# Altium PCB Cockpit.PcbDoc
Units mm, origin at the board's own origin, x right, y up, seen from the top; angles counter-clockwise.
Board outline 35 x 35 mm, 2 copper layers (Top Layer, Bottom Layer), stack 1.57 mm thick; 26 components, 19 nets, 72 pads, 0 vias.
Unrouted connection lines stored in the file: 46.
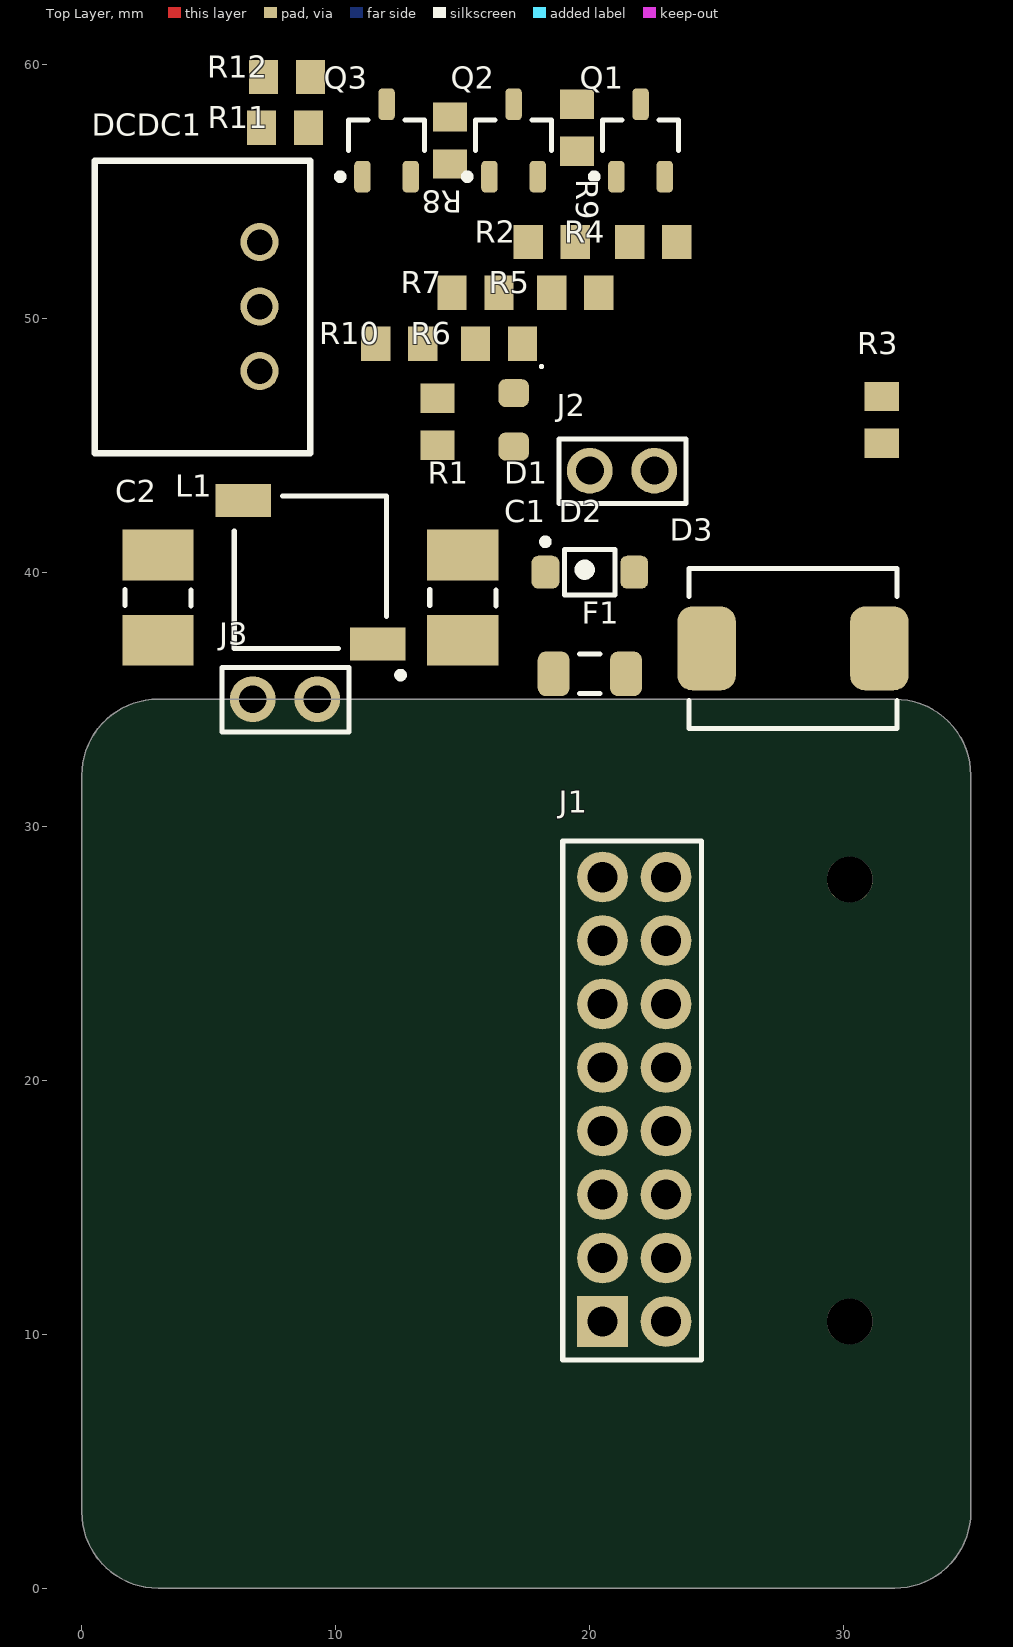
[diagram p0: Top Layer view]
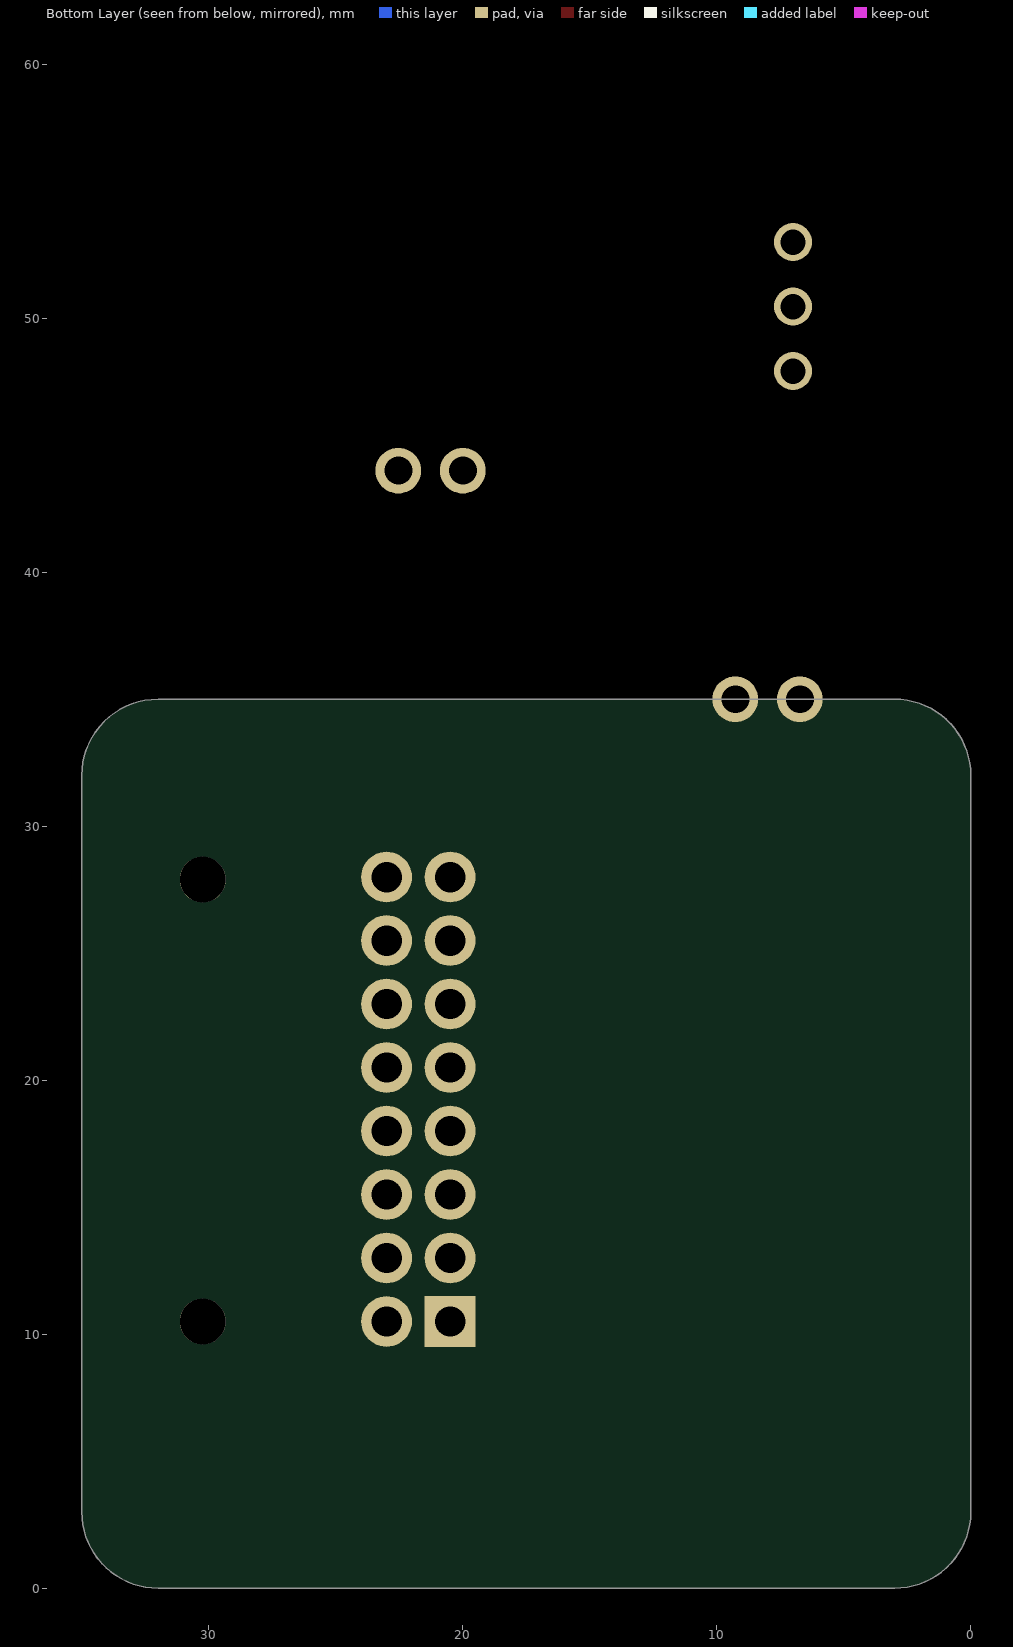
[diagram p1: Bottom Layer view, seen from below]

## Layer stack, top to bottom
Top Solder: solder mask 0.01, Solder Resist, Dk 3.5
Top Layer: signal copper 0.035
Dielectric 1: dielectric 1.5, FR-4, Dk 4.8
Bottom Layer: signal copper 0.035
Bottom Solder: solder mask 0.01, Solder Resist, Dk 3.5

## Board outline
3,0 cw(c3,3) 0,3 0,32 cw(c3,32) 3,35 32,35 cw(c32,32) 35,32 35,3 cw(c32,3) 32,0

## Design rules (kind name [scope] priority, off if disabled: settings)
Clearance [All] p1: gap=0.5 ignorepadtopadclearanceinfootprint=FALSE except(0.1: SMDPad-Hole THPad-THPad THPad-Hole Via-Hole; 0.2: Fill-Hole Poly-Hole Region-Hole)
HoleSize [All] p1: absolutevalues=TRUE maxlimit=5 minlimit=0.2 maxpercent=80.000 minpercent=20.000
HoleToHoleClearance [All] p1 off: gap=0 allowstackedmicrovias=TRUE
PolygonConnect [All] p1: connectstyle=Relief reliefconductorwidth=0.5 reliefentries=4 polygonreliefangle="90 Angle" airgapwidth=0.5
RoutingVias [All] p1: holewidth=0.3 width=0.7 viastyle="Through Hole" minholewidth=0.2 minwidth=0.5 maxholewidth=3 maxwidth=7
SolderMaskExpansion [All] p1: expansion=0.102 istentingtop=FALSE
Width [All] p1: maxlimit=5 minlimit=0.2 preferedwidth=0.5
28 further rules are at their usual default settings.

## Components (designator, comment, footprint, x,y, rotation, side; value= is the part's Value field where it differs from the comment)
C1 "GRJ32ER71H106KE11L" C10u-50V-1210FNPMLCC-X7R 15,39 r270 top
C2 "GRJ32ER71H106KE11L" C10u-50V-1210FNPMLCC-X7R 3,39 r90 top
D1 "150080VS75000" LED_0805_WE 17,46 r270 top
D2 "MBR0530" DSC-SOD123 20,40 r0 top
D3 "824551301" DTVS-DO-214AB 28,37 r180 top
DCDC1 "173951236" DCDC_Magi3c 7,50.46 r270 top
F1 "0437001.WRA" Fuse_1206 20,36 r180 top
J1 "1053141116" J_NanoFit_2x8 25.369,19.25 r90 top
J2 "61300211121" J_Pinheader_1x2 21.27,44 r180 top
J3 "61300211121" J_Pinheader_1x2 8,35 r180 top
L1 "CDC5D23BNP-470KC" L_47u-490mA_CF 9,40 r180 top
Q1 "CPH3455-TL-H" TRT-NCH-3/35-CPH 22,57 r90 top
Q2 "CPH3455-TL-H" TRT-NCH-3/35-CPH 17,57 r90 top
Q3 "CPH3455-TL-H" TRT-NCH-3/35-CPH 12,57 r90 top
R1 "CR0805-JW-102ELF" R0805FTK 14,45.925 r90 top
R2 "CR0805-JW-103ELF" R0805FTK 18.5,53 r0 top
R3 "CR0805-FX-4700GLF" R0805FTK 31.5,46 r270 top
R4 "CR0805-JW-102ELF" R0805FTK 22.5,53 r180 top
R5 "CR0805-JW-102ELF" R0805FTK 19.425,51 r180 top
R6 "CR0805-JW-102ELF" R0805FTK 16.425,49 r180 top
R7 "CR0805-JW-103ELF" R0805FTK 15.5,51 r0 top
R8 "CR0805-FX-1000ELF" R0805FTK 14.5,57 r90 top
R9 "CR0805-FX-4700GLF" R0805FTK 19.5,57.5 r270 top
R10 "CR0805-JW-103ELF" R0805FTK 12.5,49 r0 top
R11 "CR0805-FX-1000ELF" R0805FTK 8,57.5 r0 top
R12 "CR0805-FX-4700GLF" R0805FTK 8.075,59.5 r180 top

## Footprints (in the part's own frame and the unit in brackets; to place one, negate y for a bottom-side part, rotate by r counter-clockwise, add the part's x,y. Pads: shape width x height; smd on the part's side, far side on the other; paste and mask are expansions set on the pad)
C10u-50V-1210FNPMLCC-X7R [mm]
  rect 2x2.8 smd: 1(-1.675,0) 2(1.675,0)
  silkscreen extent -0.33,-1.3 0.33,1.3, body extent -1.6,-1.25 1.6,1.25, height 2.78
DCDC_Magi3c [mm]
  round 1.5 hole 1: 1(2.54,0) 2(0,0) 3(-2.54,0)
  silkscreen extent -5.75,-6.5 5.77,2, body extent -5.8,-6.5 5.8,2, height 10.2
DSC-SOD123 [mm] "SOIC, 2-Leads, Body 1,60x2,69mm, Pitch 1,27mm, IPC Low Density"
  rrect50% 1.1x1.3 smd: A(1.75,0) K(-1.75,0)
  silkscreen extent -1.87,-0.9 1,1.32, body extent -1.86,-0.8 1.86,0.8, height 1.36
DTVS-DO-214AB [mm] "Molded Diode, 2-Leads, Body 7,94x5,90mm"
  rrect50% 2.3x3.3 smd: 1(-3.4,0) 2(3.4,0)
  silkscreen extent -4.1,-3.15 4.1,3.15, body extent -4.42,-2.95 4.42,2.95, height 2.9
Fuse_1206 [mm] "Chip Resistor, 2-Leads, Body 3,20x1,58mm, IPC Medium Density"
  rrect50% 1.25x1.75 smd: 1(-1.425,0) 2(1.425,0)
  silkscreen extent -0.4,-0.77 0.4,0.77, body extent -1.6,-0.79 1.6,0.79, height 0.86
J_NanoFit_2x8 [mm]
  round 2 hole 1.2: 1(8.75,4.87) 2(6.25,4.87) 3(3.75,4.87) 4(1.25,4.87) 5(-1.25,4.87) 6(-3.75,4.87) 7(-6.25,4.87) 9(8.75,2.369) 10(6.25,2.369) 11(3.75,2.369) 12(1.25,2.369) 13(-1.25,2.369) 14(-3.75,2.369) 15(-6.25,2.369) 16(-8.75,2.369)
  rect 2x2 hole 1.2: 8(-8.75,4.87)
  round 1.8 hole 1.8: ""(-8.75,-4.87) ""(8.649,-4.87)
  silkscreen extent -10.27,0.97 10.17,6.43, body extent -10.47,-9.48 10.47,5.18, height 8.85
J_Pinheader_1x2 [mm]
  round 1.8 hole 1.1: 1(-1.27,0) 2(1.27,0)
  silkscreen extent -2.52,-1.25 2.48,1.29, body extent -2.54,-1.27 2.54,1.27, height 9.5
L_47u-490mA_CF [mm] "Precision Wire Wound Inductor, 2-Leads, Body 5,80x5,80mm, IPC Medium Density"
  rect 2.2x1.3 smd: 1(-2.65,2.825) 2(2.643,-2.832)
  silkscreen extent -3.68,-3 3,4.17, body extent -3,-3 3,3, height 2.5
LED_0805_WE [mm] "SODFL, 2-Leads, Body 1,60x3,20mm, IPC Medium Density"
  rrect50% 1.1x1.2 smd: A(1.05,0) K(-1.05,0)
  silkscreen extent -2.15,1.05 -2.05,1.15, body extent -1,-0.62 1,0.63, height 0.7
R0805FTK [mm] "Chip Resistor, 2-Leads, Body 2,00x1,25mm, IPC Medium Density"
  rect 1.15x1.35 smd: 1(-0.925,0) 2(0.925,0)
  body extent -1,-0.63 1,0.63, height 0.65
TRT-NCH-3/35-CPH [mm] "SOT23, 3-Leads, Body 2,90x2,80mm, Pitch 0,95mm, IPC Low Density"
  rrect50% 1.25x0.65 smd: D(1.425,0) G(-1.425,0.95) S(-1.425,-0.95)
  silkscreen extent -1.55,-1.5 0.8,1.95, body extent -1.4,-1.45 1.4,1.45, height 1.06

## Part data
C1 C2: library part C10u-50V-1210FNPMLCC-X7R, "Multilayer Ceramic Capacitors MLCC - SMD/SMT 1210 10uF 50volts X7R +/-10% Soft Term", Capacitance=10uF, Case Code (Imperial)=1210, Case Code (Metric)=3225, Manufacturer=Murata, Max Operating Temperature=125°C, Min Operating Temperature=-55°C, Tolerance=10%, Voltage Rating=50V, .Creator=DR, Case/Package=1210, Category="Ceramic Capacitors", ComponentLink1Description=Datasheet, ComponentLink1URL=https://eu.mouser.com/datasheet/2/281/GRJ32ER71H106KE11_01-1977929.pdf, Features="Soft Termination", Length=0.126inch, Manufacturer part number=GRJ32ER71H106KE11L, Mount="Surface Mount", Packaging="Tape and Reel", Pricing 1="1000=0,33327, 2000=0,32389, 4000=0,31450, 6000=0,30511, 8000=0,29572 (USD)", RoHS=Yes, RoHS Compliant=Yes, Stock 1=19000, Supplier 1=Avnet, Supplier Part Number 1=GRJ32ER71H106KE11L, Thickness=0.11inch, Width=0.098inch
D1: library part LEDVS-0805-40, "Led, Green, 570 Nm, 2 V, 30 Ma, 40 Mcd Rohs Compliant: Yes", Case Code (Imperial)=0805, Case Code (Metric)=2012, Color=Green, Forward Current=30mA, Forward Voltage=2V, Manufacturer 1="Wurth Electronics", Max Operating Temperature=85°C, Min Operating Temperature=-40°C, Package Quantity=4000, Supplier Part Number 1=8154237, Test Current=20mA, .Creator=DR, Case/Package=0805, Category=LEDs, ComponentLink1Description=Datasheet, ComponentLink1URL=https://www.we-online.com/catalog/datasheet/150080VS75000.pdf, ComponentLink2Description="Where buy it", ComponentLink2URL=https://katalog.we-online.de/en/led/WL-SMCW/150080VS75000, ComponentLink3Description=https://datasheet.ciiva.com/22656/150080vs75000-22656966.pdf?src-supplier=Element14, ComponentLink3URL=https://datasheet.ciiva.com/22656/150080vs75000-22656966.pdf?src-supplier=Element14, ComponentLink4Description=https://datasheet.ciiva.com/29279/759437-da-01-en-chipled-0805-w-kl-h-gruen-150080vs7500-29279047.pdf?src-supplier=Conrad, ComponentLink4URL=https://datasheet.ciiva.com/29279/759437-da-01-en-chipled-0805-w-kl-h-gruen-150080vs7500-29279047.pdf?src-supplier=Conrad, ComponentLink5Description=https://datasheet.ciiva.com/29563/150080vs75000-29563018.pdf?src-supplier=Digi-Key, ComponentLink5URL=https://datasheet.ciiva.com/29563/150080vs75000-29563018.pdf?src-supplier=Digi-Key, Dominant Wavelength=570nm, Height=0.7mm, Length=2mm, Lens Style=Clear,Rectangular, Luminous Intensity=40mcd, Manufacturer Part Number 1=150080VS75000, Mount="Surface Mount", Packaging="Tape and Reel", Pricing 1="50=0,19300, 500=0,12900, 1000=0,12300, 2000=0,11700, 4000=0,11100 (USD)", REACH SVHC=Unknown, RoHS=Yes, Stock 1=850, Supplier 1=RSComponents, Viewing Angle=140°, Wavelength=570nm, Width=1.25mm
D2: library part DSC-0.5/30-SOD123, "VR=30V IF=500mA 30pF P=410mW", Average Rectified Current=500mA, Forward Voltage=430mV, Max Forward Surge Current (Ifsm)=5.5A, Max Repetitive Reverse Voltage (Vrrm)=30V, Max Reverse Current=130uA, Package Quantity=1, Supplier Part Number 1=15R3453, .Creator=GP, Category=Diode, ComponentLink1Description=Datasheet, ComponentLink2Description="Where buy it", ComponentLink3Description=https://datasheet.ciiva.com/30479/0900766b810e2512-30479401.pdf?src-supplier=RSComponents, ComponentLink3URL=https://datasheet.ciiva.com/30479/0900766b810e2512-30479401.pdf?src-supplier=RSComponents, ComponentLink4Description=https://datasheet.ciiva.com/34301/974753-34301826.pdf?src-supplier=Jameco, ComponentLink4URL=https://datasheet.ciiva.com/34301/974753-34301826.pdf?src-supplier=Jameco, ComponentLink5Description=https://datasheet.ciiva.com/910/mbr0530-910516.pdf?src-supplier=Digi-Key, ComponentLink5URL=https://datasheet.ciiva.com/910/mbr0530-910516.pdf?src-supplier=Digi-Key, ComponentLink6Description=https://datasheet.ciiva.com/25931/mbr0530-25931989.pdf?src-supplier=Avnet+Europe, ComponentLink6URL=https://datasheet.ciiva.com/25931/mbr0530-25931989.pdf?src-supplier=Avnet+Europe, ComponentLink7Description=https://datasheet.ciiva.com/8300/mbr0530-8300905.pdf?src-supplier=Avnet, ComponentLink7URL=https://datasheet.ciiva.com/8300/mbr0530-8300905.pdf?src-supplier=Avnet, ComponentLink8Description=https://datasheet.ciiva.com/17318/mbr0530-17318568.pdf?src-supplier=Future+Electronics, ComponentLink8URL=https://datasheet.ciiva.com/17318/mbr0530-17318568.pdf?src-supplier=Future+Electronics, ComponentLink9Description=https://datasheet.ciiva.com/15144/getdatasheetpartid-86760-15144598.pdf?src-supplier=Verical, ComponentLink9URL=https://datasheet.ciiva.com/15144/getdatasheetpartid-86760-15144598.pdf?src-supplier=Verical, ComponentLink10Description=https://datasheet.ciiva.com/910/mbr0530-910518.pdf?src-supplier=Digi-Key, ComponentLink10URL=https://datasheet.ciiva.com/910/mbr0530-910518.pdf?src-supplier=Digi-Key, Contact Plating=Tin,Matte, Current Rating=500mA, Element Configuration=Single, Forward Current=500mA, Height=1.03mm, Lead Free="Lead Free", Length=2.7mm, Max Reverse Leakage Current=130uA, Max Reverse Voltage (DC)=30V, Max Surge Current=5.5A, Mount="Surface Mount", Output Current=500mA, Peak Non-Repetitive Surge Current=5.5A, Polarity=Standard, Pricing 1="1=0,34400, 10=0,23900, 100=0,12200, 500=0,10000 (USD)", Radiation Hardening=No, REACH SVHC="No SVHC", RoHS Compliant=Yes, Series=-, Stock 1=9, Supplier 1=Newark, Voltage Rating (DC)=30V, Weight=0.03g, Width=1.6mm
D3: library part DTVS-40V-DO-214AB, "TVS diode [Würth Elektronik] 824551301 TVS diode", Clamping Voltage=48.4V, Manufacturer="Wurth Electronics", Max Breakdown Voltage=35.05V, Max Operating Temperature=150°C, Min Operating Temperature=-65°C, Peak Pulse Current=62A, Peak Pulse Power=3kW, Power Line Protection=No, Resistor Type=Zener, Reverse Standoff Voltage=30V, Supplier Part Number 1=9217092P, .Creator=DO, Category="TVS Diodes", ComponentLink1Description=http://www.farnell.com/datasheets/2036459.pdf?src-supplier=Element14, ComponentLink1URL=http://www.farnell.com/datasheets/2036459.pdf?src-supplier=Element14, ComponentLink2Description="Where buy it", ComponentLink2URL=https://www.we-online.com/catalog/en/WE-TVSP?sq=824551301#824551301, Manufacturer part number=824551301, Min Breakdown Voltage=35.05V, Mount="Surface Mount", Number of Bidirectional Channels=1, Number of Pins=2, Packaging="Cut Tape", Polarity=Bidirectional, Pricing 1="10=1,72500, 50=1,54700, 100=1,45300, 250=1,35100, 500=1,15000 (USD)", REACH SVHC=Unknown, RoHS=Yes, RoHS Compliant=Yes, Stock 1=1, Supplier 1=RSComponents
DCDC1: library part DCDC-36V/12V-0.5A, "Fdsm Fixed Step Down Regulator M", Manufacturer 1="Wurth Electronics", Supplier Part Number 1=732-173951236-ND, Category="Board Mount Modules", ComponentLink1Description=Datasheet, ComponentLink1URL=https://www.we-online.com/catalog/datasheet/173951236.pdf, Manufacturer Part Number 1=173951236, Pricing 1="1=3,29000, 10=2,99100, 20=2,81300, 30=2,63600, 43=2,39907 (USD)", RoHS=No, Stock 1=32, Supplier 1=Digi-Key
F1: library part Fuse_1A_63V_1206, "Fuse Chip Fast Acting 1A 63V SMD Solder Pad 1206 Ceramic T/R Automotive", Case Code (Imperial)=1206, Case Code (Metric)=3216, Current Rating=1A, Manufacturer=Littelfuse, Max Operating Temperature=150°C, Min Operating Temperature=-55°C, Supplier Part Number 1=F10001CT-ND, Voltage Rating (AC)=63V, .Creator=DO, Approvals=CSA,cURus, Case/Package=1206, Category=Fuses, ComponentLink1Description=https://www.littelfuse.com/~/media/electronics/datasheets/fuses/littelfuse_fuse_437a_datasheet.pdf.pdf?src-supplier=Digi-Key, ComponentLink1URL=https://www.littelfuse.com/~/media/electronics/datasheets/fuses/littelfuse_fuse_437a_datasheet.pdf.pdf?src-supplier=Digi-Key, ComponentLink2Description="Where buy it", ComponentLink2URL=https://www.mouser.es/ProductDetail/Littelfuse/0437001WRA?qs=DXv0QSHKF4z9CJhPXjxR%252BA%3D%3D, Fuse Type="Board Mount (Cartridge Style Excluded)", Manufacturer part number=0437001.WRA, Mount="Surface Mount", Packaging="Tape and Reel", Pricing 1="1=1,52000, 5=1,47000, 10=1,37600, 50=1,13860, 100=0,94880, 250=0,92508, 500=0,78276, 1000=0,68788 (USD)", RoHS=Yes, Stock 1=5820, Supplier 1=Digi-Key, Voltage Rating (DC)=63V
J1: library part J_NanoFit_2x8, "Nano-Fit Right Angle Header Through Hole 2.50mm Pitch Dual Row 16 Circuits Tin (Sn) Plating Black", Manufacturer=Molex, Manufacturer part number=105314-1116, Supplier Part Number 1=33AC7692, .Creator=DO, Category="Headers and Wire Housings", ComponentLink1Description=https://www.molex.com/pdm_docs/ps/PS-105300-100-001.pdf?src-supplier=Digi-Key, ComponentLink1URL=https://www.molex.com/pdm_docs/ps/PS-105300-100-001.pdf?src-supplier=Digi-Key, ComponentLink2Description="Where buy it", ComponentLink2URL=https://www.molex.com/molex/products/part-detail/pcb_headers/1053141116, Pricing 1="1=3,37000, 10=3,24000, 25=2,88000, 50=2,81000, 100=2,73000, 250=2,44000 (USD)", RoHS=Yes, Stock 1=366, Supplier 1=Newark
J2 J3: library part J_Jumper, "CONN HEADER 2 POS 2.54", Color=Black, Current Rating=3A, Manufacturer=Molex, Max Operating Temperature=125°C, Maximum current="3 A", Maximum voltage="250 V AC", Min Operating Temperature=-40°C, Supplier Part Number 1=8281581, Temperature rating="-40° to +105°C", Voltage Rating=250V, .Creator=GP, Application=Shortcircuit, Category=Connector, Category type=PCB-PCB, ComponentLink1Description=Datasheet, ComponentLink1URL=https://www.we-online.com/catalog/datasheet/61300211121.pdf, ComponentLink2Description="Where buy it", ComponentLink2URL=https://www.we-online.com/catalog/en/PHD_2_54_THT_PIN_HEADER_6130XX11121?sq=61300211121&sp=https%3A%2F%2Fwww.we-online.com%2Fweb%2Fen%2Fwuerth_elektronik%2Fsearchpage.php%3Fsearch%3D61300211121#61300211121, ComponentLink3Description=https://datasheet.ciiva.com/13619/6130xx11121-48870-13619345.pdf?src-supplier=Mouser, ComponentLink3URL=https://datasheet.ciiva.com/13619/6130xx11121-48870-13619345.pdf?src-supplier=Mouser, Connections=1x2, Connector Type="Male Pin", Contact Gender=Male, Contact Material="Copper Alloy,Copper", Contact Mating Length=0.236inch, Contact Plating=Gold, Flammability=94V-0, Gender=Male, Housing Material=PBT, Lead Free="Lead Free", Manufacturer part number=61300211121, Mount="Through hole", Number of Contacts=2, Number of Positions=2, Number of Rows=1, Orientation=Vertical, Packaging=Bulk, Pitch=0.1inch, Pricing 1="5=0,14100, 50=0,09700, 100=0,07800, 200=0,07300, 500=0,06800 (USD)", Product name="Pin Header", REACH SVHC=Unknown, Stock 1=1855, Supplier="Würth Elektronik", Supplier 1=RSComponents, Termination="Through Hole"
L1: library part L_47u-490mA_CF, "Inductor Power Unshielded Wirewound 47uH 10% 100KHz Ferrite 490mA 546mOhm DCR T/R", Case/Package=Nonstandard, Current Rating=490mA, DC Resistance (DCR)=546mR, Inductance=47uH, Manufacturer=Sumida, Max Operating Temperature=100°C, Min Operating Temperature=-40°C, Package Quantity=2000, Supplier Part Number 1=851-CDC5D23BNP-470KC, Test Frequency=100kHz, Tolerance=10%, .Creator=GP, Category="Fixed Inductors", ComponentLink1Description=http://www.mouser.com/ds/2/390/CDC5D23B-465898.pdf?src-supplier=Mouser, ComponentLink1URL=http://www.mouser.com/ds/2/390/CDC5D23B-465898.pdf?src-supplier=Mouser, ComponentLink3Description=http://products.sumida.com/products/pdf/CDC5D23B.pdf?src-supplier=Digi-Key, ComponentLink3URL=http://products.sumida.com/products/pdf/CDC5D23B.pdf?src-supplier=Digi-Key, Core Material=Ferrite, Height=2.5mm, Height - Seated (Max)=0.098inch, Lead Free="Lead Free", Length=0.228inch, Manufacturer part number=CDC5D23BNP-470KC, Max DC Current=490mA, Mount="Surface Mount", Packaging="Tape and Reel", Pricing 1="1=0,95000, 10=0,71100, 50=0,71100, 100=0,59700, 1000=0,40600, 10000=0,38100 (USD)", RoHS=Yes, RoHS Compliant=Yes, Series=CDC5D23B, Shielding=Unshielded, Stock 1=3779, Supplier 1=Mouser, Termination=SMD/SMT, Weight=0.007584oz, Width=5.8mm
Q1 Q2 Q3: library part TRT-NCH-3/35-CPH, "CPH3455-TL-H N-channel MOSFET Transistor; 3 A; 35 V; 3-Pin CPH", Case/Package=SC, Continuous Drain Current (ID)=3A, Drain to Source Breakdown Voltage=35V, Drain to Source Resistance=108mR, Gate to Source Voltage (Vgs)=20V, Input Capacitance=186pF, Manufacturer="ON Semiconductor", Max Operating Temperature=150°C, Max power dissipation=1W, Min Operating Temperature=-55°C, Package Quantity=3000, Supplier Part Number 1=8009989, .Creator=GP, Category=Transistor, ComponentLink1Description=Datasheet, ComponentLink1URL=https://docs.rs-online.com/5847/0900766b812d514d.pdf, ComponentLink2Description="Where buy it", ComponentLink2URL=https://es.rs-online.com/web/p/mosfet/8009989, ComponentLink3Description=https://datasheet.ciiva.com/947/cph3455-d-947201.pdf?src-supplier=Digi-Key, ComponentLink3URL=https://datasheet.ciiva.com/947/cph3455-d-947201.pdf?src-supplier=Digi-Key, ComponentLink4Description=https://datasheet.ciiva.com/4444/cph3455-d-91653-4444616.pdf?src-supplier=Mouser, ComponentLink4URL=https://datasheet.ciiva.com/4444/cph3455-d-91653-4444616.pdf?src-supplier=Mouser, ComponentLink5Description=https://datasheet.ciiva.com/11164/cph3455-d-11164889.pdf?src-supplier=Avnet, ComponentLink5URL=https://datasheet.ciiva.com/11164/cph3455-d-11164889.pdf?src-supplier=Avnet, Drain to Source Voltage (Vdss)=35V, Element Configuration=Single, Fall Time=5.7ns, Halogen Free="Halogen Free", Height=0.9mm, Lead Free="Lead Free", Length=2.9mm, Manufacturer part number=CPH3455-TL-H, Number of Pins=3, Packaging="Tape and Reel", Polarity=N-CHANNEL, Power Dissipation=1W, Pricing 1="50=0,50400 (USD)", Rds On Max=104mR, Rise Time=4.7ns, RoHS=Yes, RoHS Compliant=Yes, Series=-, Stock 1=1, Supplier 1=RSComponents, Turn-Off Delay Time=15ns, Turn-On Delay Time=4.2ns, Width=1.6mm
R1 R4 R5 R6: library part R1k-0805FTK, "Res Thick Film 0805 1K Ohm 5% 1/8W ±200ppm/°C Molded SMD SMD Paper Tape on Plastic Reel", Case Code (Imperial)=0805, Case Code (Metric)=2012, Manufacturer 1=Bourns, Max Operating Temperature=155°C, Max power dissipation=125mW, Min Operating Temperature=-55°C, Package Quantity=1, Resistance=1kR, Resistor Type="Thick Film", Temperature Coefficient=200ppm/°C, Tolerance=5%, Voltage Rating=150V, .Creator=GP, Case/Package=0805, Category="Chip SMD Resistors", ComponentLink1Description=https://datasheet.ciiva.com/11821/0900766b80fcdb72-11821134.pdf?src-supplier=RSComponents, ComponentLink1URL=https://datasheet.ciiva.com/11821/0900766b80fcdb72-11821134.pdf?src-supplier=RSComponents, ComponentLink2Description=https://datasheet.ciiva.com/15225/getdatasheetpartid-78155-15225381.pdf?src-supplier=Verical, ComponentLink2URL=https://datasheet.ciiva.com/15225/getdatasheetpartid-78155-15225381.pdf?src-supplier=Verical, ComponentLink3Description=https://datasheet.ciiva.com/22693/1902866-22693253.pdf?src-supplier=Element14, ComponentLink3URL=https://datasheet.ciiva.com/22693/1902866-22693253.pdf?src-supplier=Element14, ComponentLink4Description=https://datasheet.ciiva.com/7986/1856384-7986184.pdf?src-supplier=Element14, ComponentLink4URL=https://datasheet.ciiva.com/7986/1856384-7986184.pdf?src-supplier=Element14, ComponentLink5Description=https://datasheet.ciiva.com/7985/1856384-7985867.pdf?src-supplier=Element14, ComponentLink5URL=https://datasheet.ciiva.com/7985/1856384-7985867.pdf?src-supplier=Element14, ComponentLink6Description=https://datasheet.ciiva.com/30242/159chpreztr-30242765.pdf?src-supplier=Onlinecomponents.com, ComponentLink6URL=https://datasheet.ciiva.com/30242/159chpreztr-30242765.pdf?src-supplier=Onlinecomponents.com, ComponentLink7Description=https://datasheet.ciiva.com/6547/chpreztr-6547359.pdf?src-supplier=Digi-Key, ComponentLink7URL=https://datasheet.ciiva.com/6547/chpreztr-6547359.pdf?src-supplier=Digi-Key, Contact Plating=Tin, Depth=1.25mm, Features="Moisture Resistant", Height=0.5mm, Lead Free="Lead Free", Length=2mm, Manufacturer Part Number 1=CR0805-JW-102ELF, Military Standard=Not, Mount="Surface Mount", Number of Pins=2, Number of Terminations=2, Packaging="Tape and Reel", Power rating=125mW, Pricing 1="1=0,05930, 10=0,03510, 25=0,01790, 100=0,00800, 250=0,00790, 500=0,00590, 1000=0,00360, 3000=0,00350, 6000=0,00250 (USD)", Radiation Hardening=No, REACH SVHC="No SVHC", RoHS=Yes, Stock 1=27510, Supplier 1="Arrow Electronics", Supplier Part Number 1=CR0805-JW-102ELF, Termination=SMD/SMT, Thickness=508um, Voltage Rating (DC)=150V, Width=1.25mm
R2 R7 R10: library part R10k-0805FTK, "BOURNS         CR0805-JW-103ELF            Surface Mount Chip Resistor, Thick Film, CR Series, 10 kohm, 125 mW,  5%, 150 V", Case Code (Imperial)=0805, Case Code (Metric)=2012, Manufacturer 1=Bourns, Max Operating Temperature=155°C, Max power dissipation=125mW, Min Operating Temperature=-55°C, Package Quantity=1, Resistance=10kR, Resistance Tolerance=5%, Resistor Type="Thick Film", Temperature Coefficient=200ppm/°C, Voltage Rating=150V, Voltage Rating (DC)=100V, .Creator=DR, Case/Package=0805, Category="Chip SMD Resistors", ComponentLink1Description=https://datasheet.ciiva.com/11821/0900766b80fcdb72-11821135.pdf?src-supplier=RSComponents, ComponentLink1URL=https://datasheet.ciiva.com/11821/0900766b80fcdb72-11821135.pdf?src-supplier=RSComponents, ComponentLink2Description=https://datasheet.ciiva.com/9122/chpreztr-9122374.pdf?src-supplier=Avnet, ComponentLink2URL=https://datasheet.ciiva.com/9122/chpreztr-9122374.pdf?src-supplier=Avnet, ComponentLink3Description=https://datasheet.ciiva.com/22693/1902866-22693254.pdf?src-supplier=Element14, ComponentLink3URL=https://datasheet.ciiva.com/22693/1902866-22693254.pdf?src-supplier=Element14, ComponentLink4Description=https://datasheet.ciiva.com/7986/691949-7986187.pdf?src-supplier=Element14, ComponentLink4URL=https://datasheet.ciiva.com/7986/691949-7986187.pdf?src-supplier=Element14, ComponentLink5Description=https://datasheet.ciiva.com/30065/159chpreztr-30065976.pdf?src-supplier=Onlinecomponents.com, ComponentLink5URL=https://datasheet.ciiva.com/30065/159chpreztr-30065976.pdf?src-supplier=Onlinecomponents.com, ComponentLink6Description=https://datasheet.ciiva.com/16783/70154685-16783482.pdf?src-supplier=Allied+Electronics, ComponentLink6URL=https://datasheet.ciiva.com/16783/70154685-16783482.pdf?src-supplier=Allied+Electronics, ComponentLink7Description=https://datasheet.ciiva.com/5548/chpreztr-5548491.pdf?src-supplier=Mouser, ComponentLink7URL=https://datasheet.ciiva.com/5548/chpreztr-5548491.pdf?src-supplier=Mouser, ComponentLink8Description=https://datasheet.ciiva.com/6559/chpreztr-6559900.pdf?src-supplier=Digi-Key, ComponentLink8URL=https://datasheet.ciiva.com/6559/chpreztr-6559900.pdf?src-supplier=Digi-Key, ComponentLink9Description=https://datasheet.ciiva.com/6559/chpreztr-6559901.pdf?src-supplier=Digi-Key, ComponentLink9URL=https://datasheet.ciiva.com/6559/chpreztr-6559901.pdf?src-supplier=Digi-Key, ComponentLink10Description=https://datasheet.ciiva.com/7985/1856384-7985869.pdf?src-supplier=Element14, ComponentLink10URL=https://datasheet.ciiva.com/7985/1856384-7985869.pdf?src-supplier=Element14, ComponentLink11Description=https://datasheet.ciiva.com/48692/001055517-da-01-en-smd-wid-cr0805-jw-103elf-10k-ohm-1-8w-48692118.pdf?src-supplier=Conrad, ComponentLink11URL=https://datasheet.ciiva.com/48692/001055517-da-01-en-smd-wid-cr0805-jw-103elf-10k-ohm-1-8w-48692118.pdf?src-supplier=Conrad, Construction=Rectangular, Contact Plating=Tin, Depth=1.25mm, Features="Moisture Resistant", Height=0.5mm, Length=2mm, Manufacturer Part Number 1=CR0805-JW-103ELF, Military Standard=Not, Mount="Surface Mount", Number of Pins=2, Number of Terminations=2, Packaging="Tape and Reel", Power rating=125mW, Pricing 1="1=0,05790, 10=0,01540, 25=0,01340, 100=0,00340 (USD)", Radiation Hardening=No, REACH SVHC="No SVHC", RoHS=Yes, RoHS Compliant=Yes, Series=CR0805, Stock 1=57566, Supplier 1="Arrow Electronics", Supplier Part Number 1=CR0805-JW-103ELF, Technology="THICK FILM", Termination=SMD/SMT, Thickness=508um, Tolerance=5%, Width=1.25mm
R3 R9 R12: library part R470-0805FTK, "Res Thick Film 0805 470 Ohm 1% 1/8W ±100ppm/°C Molded SMD SMD Paper Tape on Plastic Reel", Case Code (Imperial)=0805, Case Code (Metric)=2012, Manufacturer 1=Bourns, Max Operating Temperature=155°C, Max power dissipation=125mW, Min Operating Temperature=-55°C, Resistance=470R, Resistance Tolerance=1%, Resistor Type="Thick Film", Temperature Coefficient=100ppm/°C, Voltage Rating=150V, .Creator=DR, Case/Package=0805, Category="Chip SMD Resistors", ComponentLink1Description=https://datasheet.ciiva.com/11808/0900766b80fcdb72-11808686.pdf?src-supplier=RSComponents, ComponentLink1URL=https://datasheet.ciiva.com/11808/0900766b80fcdb72-11808686.pdf?src-supplier=RSComponents, ComponentLink2Description=https://datasheet.ciiva.com/7985/1856384-7985880.pdf?src-supplier=Element14, ComponentLink2URL=https://datasheet.ciiva.com/7985/1856384-7985880.pdf?src-supplier=Element14, ComponentLink3Description=https://datasheet.ciiva.com/22693/1902866-22693247.pdf?src-supplier=Element14, ComponentLink3URL=https://datasheet.ciiva.com/22693/1902866-22693247.pdf?src-supplier=Element14, ComponentLink4Description=https://datasheet.ciiva.com/5541/chpreztr-5541930.pdf?src-supplier=Mouser, ComponentLink4URL=https://datasheet.ciiva.com/5541/chpreztr-5541930.pdf?src-supplier=Mouser, Construction=Rectangular, Contact Plating=Tin, Depth=1.25mm, Features="Moisture Resistant", Height=0.5mm, Length=2mm, Manufacturer Part Number 1=CR0805-FX-4700GLF, Military Standard=Not, Mount="Surface Mount", Number of Pins=2, Number of Terminations=2, Packaging="Tape and Reel", Power rating=125mW, Pricing 1="1=0,00990, 10=0,00980, 25=0,00950, 50=0,00940, 100=0,00930, 250=0,00920, 500=0,00910, 1000=0,00890, 3000=0,00870, 6000=0,00860 (USD)", Radiation Hardening=No, REACH SVHC="No SVHC", RoHS=Yes, Series=CR0805, Stock 1=12623, Supplier 1="Arrow Electronics", Supplier Part Number 1=CR0805-FX-4700GLF, Technology="THICK FILM", Termination=SMD/SMT, Thickness=508um, Tolerance=1%, Voltage Rating (DC)=150V
R8 R11: library part R100-0805FTK, "Res Thick Film 0805 100 Ohm 1% 1/8W ±100ppm/°C Molded SMD SMD Paper Tape on Plastic Reel", Case Code (Imperial)=0805, Case Code (Metric)=2012, Manufacturer 1=Bourns, Max Operating Temperature=155°C, Max power dissipation=125mW, Min Operating Temperature=-55°C, Package Quantity=1, Resistance=100R, Resistance Tolerance=1%, Resistor Type="Thick Film", Temperature Coefficient=100ppm/°C, Voltage Rating=150V, .Creator=DR, Case/Package=0805, Category="Chip SMD Resistors", ComponentLink1Description=https://datasheet.ciiva.com/11809/0900766b80fcdb72-11809178.pdf?src-supplier=RSComponents, ComponentLink1URL=https://datasheet.ciiva.com/11809/0900766b80fcdb72-11809178.pdf?src-supplier=RSComponents, ComponentLink2Description=https://datasheet.ciiva.com/6547/chpreztr-6547413.pdf?src-supplier=Digi-Key, ComponentLink2URL=https://datasheet.ciiva.com/6547/chpreztr-6547413.pdf?src-supplier=Digi-Key, ComponentLink3Description=https://datasheet.ciiva.com/6547/chpreztr-6547414.pdf?src-supplier=Digi-Key, ComponentLink3URL=https://datasheet.ciiva.com/6547/chpreztr-6547414.pdf?src-supplier=Digi-Key, ComponentLink4Description=https://datasheet.ciiva.com/6547/chpreztr-6547415.pdf?src-supplier=Digi-Key, ComponentLink4URL=https://datasheet.ciiva.com/6547/chpreztr-6547415.pdf?src-supplier=Digi-Key, ComponentLink5Description=https://datasheet.ciiva.com/9120/chpreztr-9120744.pdf?src-supplier=Avnet, ComponentLink5URL=https://datasheet.ciiva.com/9120/chpreztr-9120744.pdf?src-supplier=Avnet, Construction=Rectangular, Contact Plating=Tin, Depth=1.25mm, Features="Moisture Resistant", Height=0.5mm, Length=2mm, Manufacturer Part Number 1=CR0805-FX-1000ELF, Military Standard=Not, Mount="Surface Mount", Number of Pins=2, Number of Terminations=2, Packaging="Tape and Reel", Power rating=125mW, Pricing 1="1=0,05840, 10=0,03430, 25=0,01780, 100=0,00750, 250=0,00560, 500=0,00490, 3000=0,00470 (USD)", Radiation Hardening=No, REACH SVHC="No SVHC", RoHS=Yes, RoHS Compliant=Yes, Series=CR0805, Stock 1=49802, Supplier 1="Arrow Electronics", Supplier Part Number 1=CR0805-FX-1000ELF, Technology="THICK FILM", Termination=SMD/SMT, Thickness=508um, Tolerance=1%, Voltage Rating (DC)=150V, Width=1.25mm

## Nets (pads, with @x,y where several pads share a name; then routed paths per layer and width w, separated by ;. In a path a pad name is that pad's centre, name@x,y a point inside that pad or via, vN(x,y) a via of type N, cw(c..) or ccw(c..) an arc to the next point about the centre after c; other vN are vias at no path point)
+12: DCDC1.3 R1.2 R3.2 R9.2 R12.2
BMS_LED+: J1.5 Q2.D R9.1
BMS_LED-: J1.6 Q2.S R8.2
BMS_OK: J1.11 R5.1
GND: C1.1 C2.1 D1.K D3.1 DCDC1.2 J1.9 Q1.S R2.1 R7.1 R8.1 R10.1 R11.1
IMD_LED+: J1.14 Q3.D R12.1
IMD_LED-: J1.13 Q3.S R11.2
IMD_OK: J1.10 R6.1
LV+_in: D2.A D3.2 J1.1 J2.1
NetC1_2: C1.2 F1.2 J3.1 L1.1
NetC2_2: C2.2 DCDC1.1 J3.2 L1.2
NetD1_A: D1.A R1.1
NetD2_K: D2.K F1.1 J2.2
NetQ1_G: Q1.G R2.2 R4.2
NetQ2_G: Q2.G R5.2 R7.2
NetQ3_G: Q3.G R6.2 R10.2
TS_OFF: J1.12 R4.1
TS_OFF_LED+: J1.3 R3.1
TS_OFF_LED-: J1.4 Q1.D
pads on no net: J1. J1.2 J1.7 J1.8 J1.15 J1.16

## Silkscreen, mask and mechanical layers (free items; w line width, h text height)
Mechanical 1:
  the board outline again, w0.5